# Altium PCB kbd_training.PcbDoc
Units mm, origin at the board's own origin, x right, y up, seen from the top; angles counter-clockwise.
Board outline 74 x 91.8 mm, 2 copper layers (Top Layer, Bottom Layer); 55 components, 41 nets, 240 pads, 29 vias.
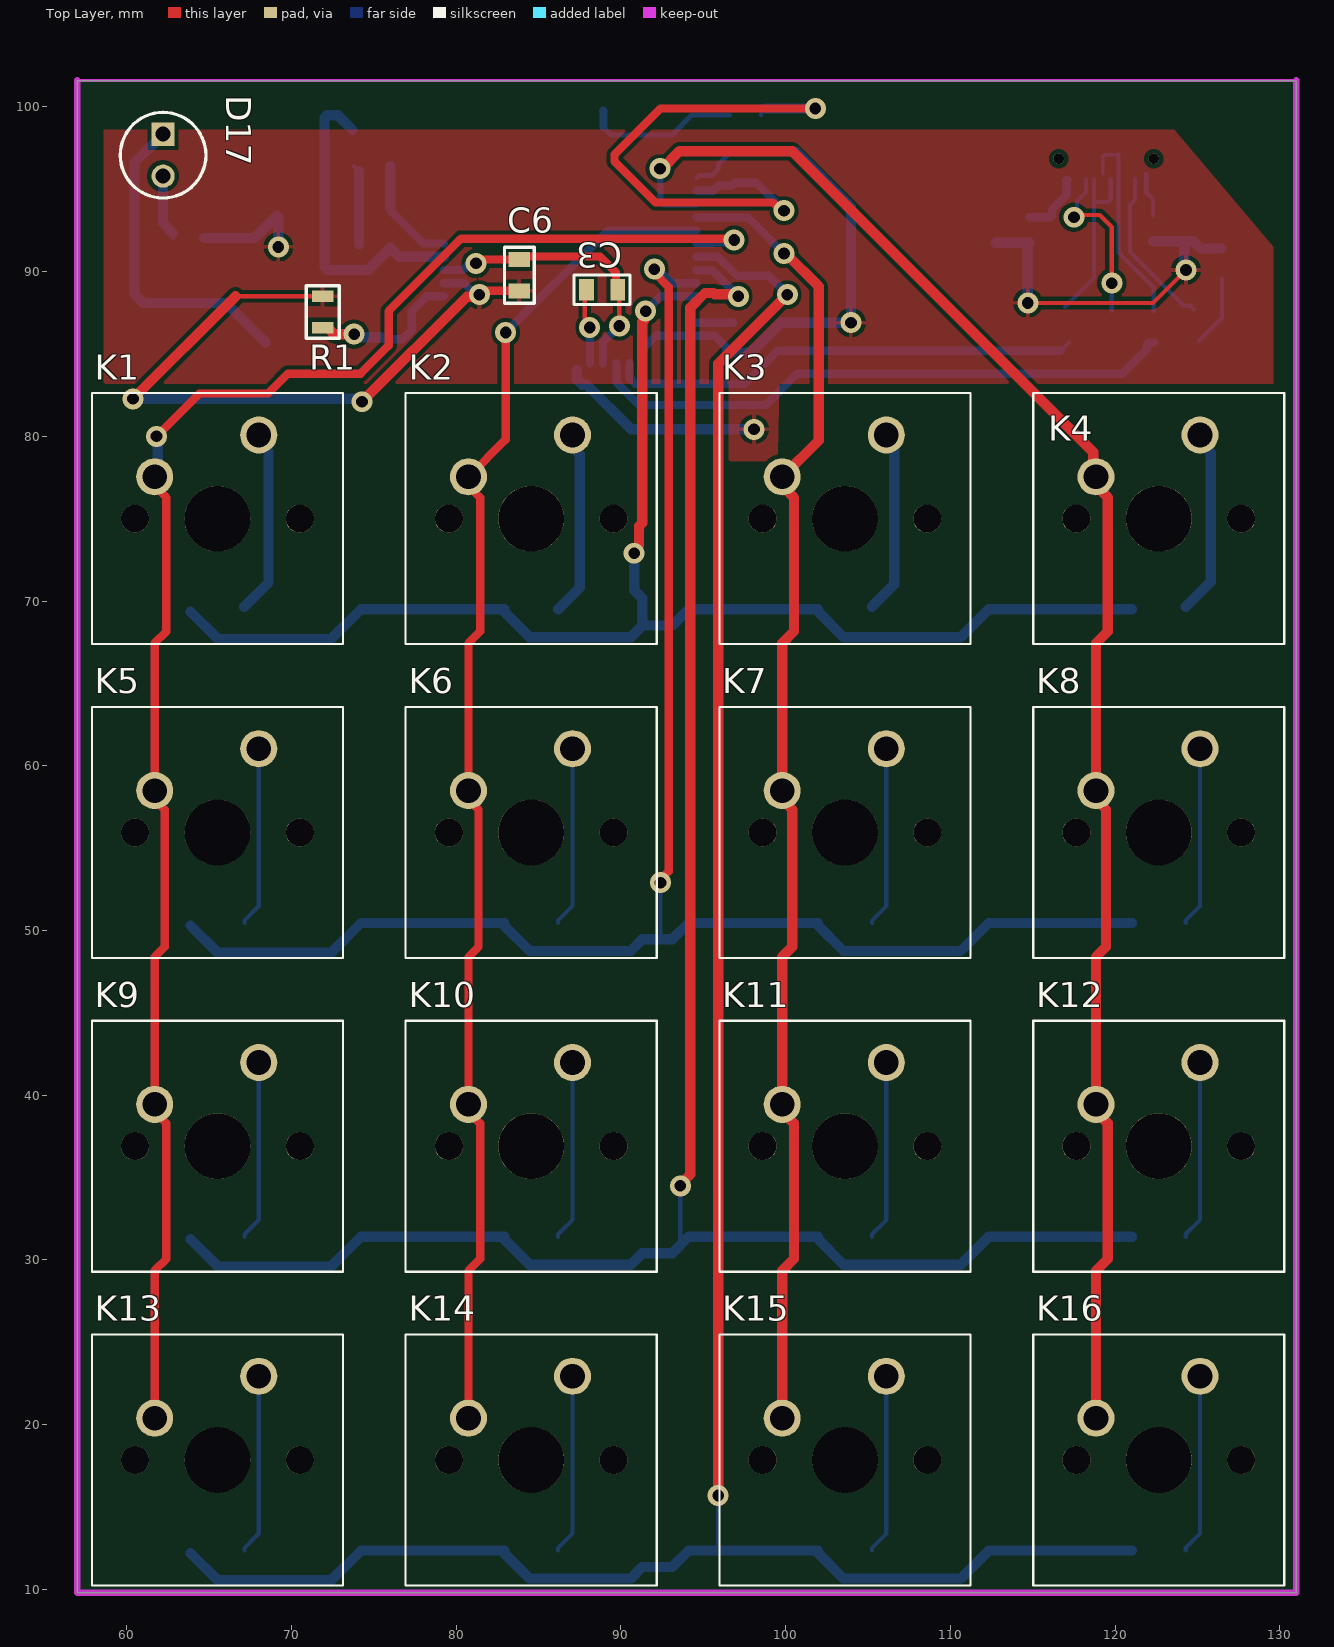
[diagram p0: Top Layer view]
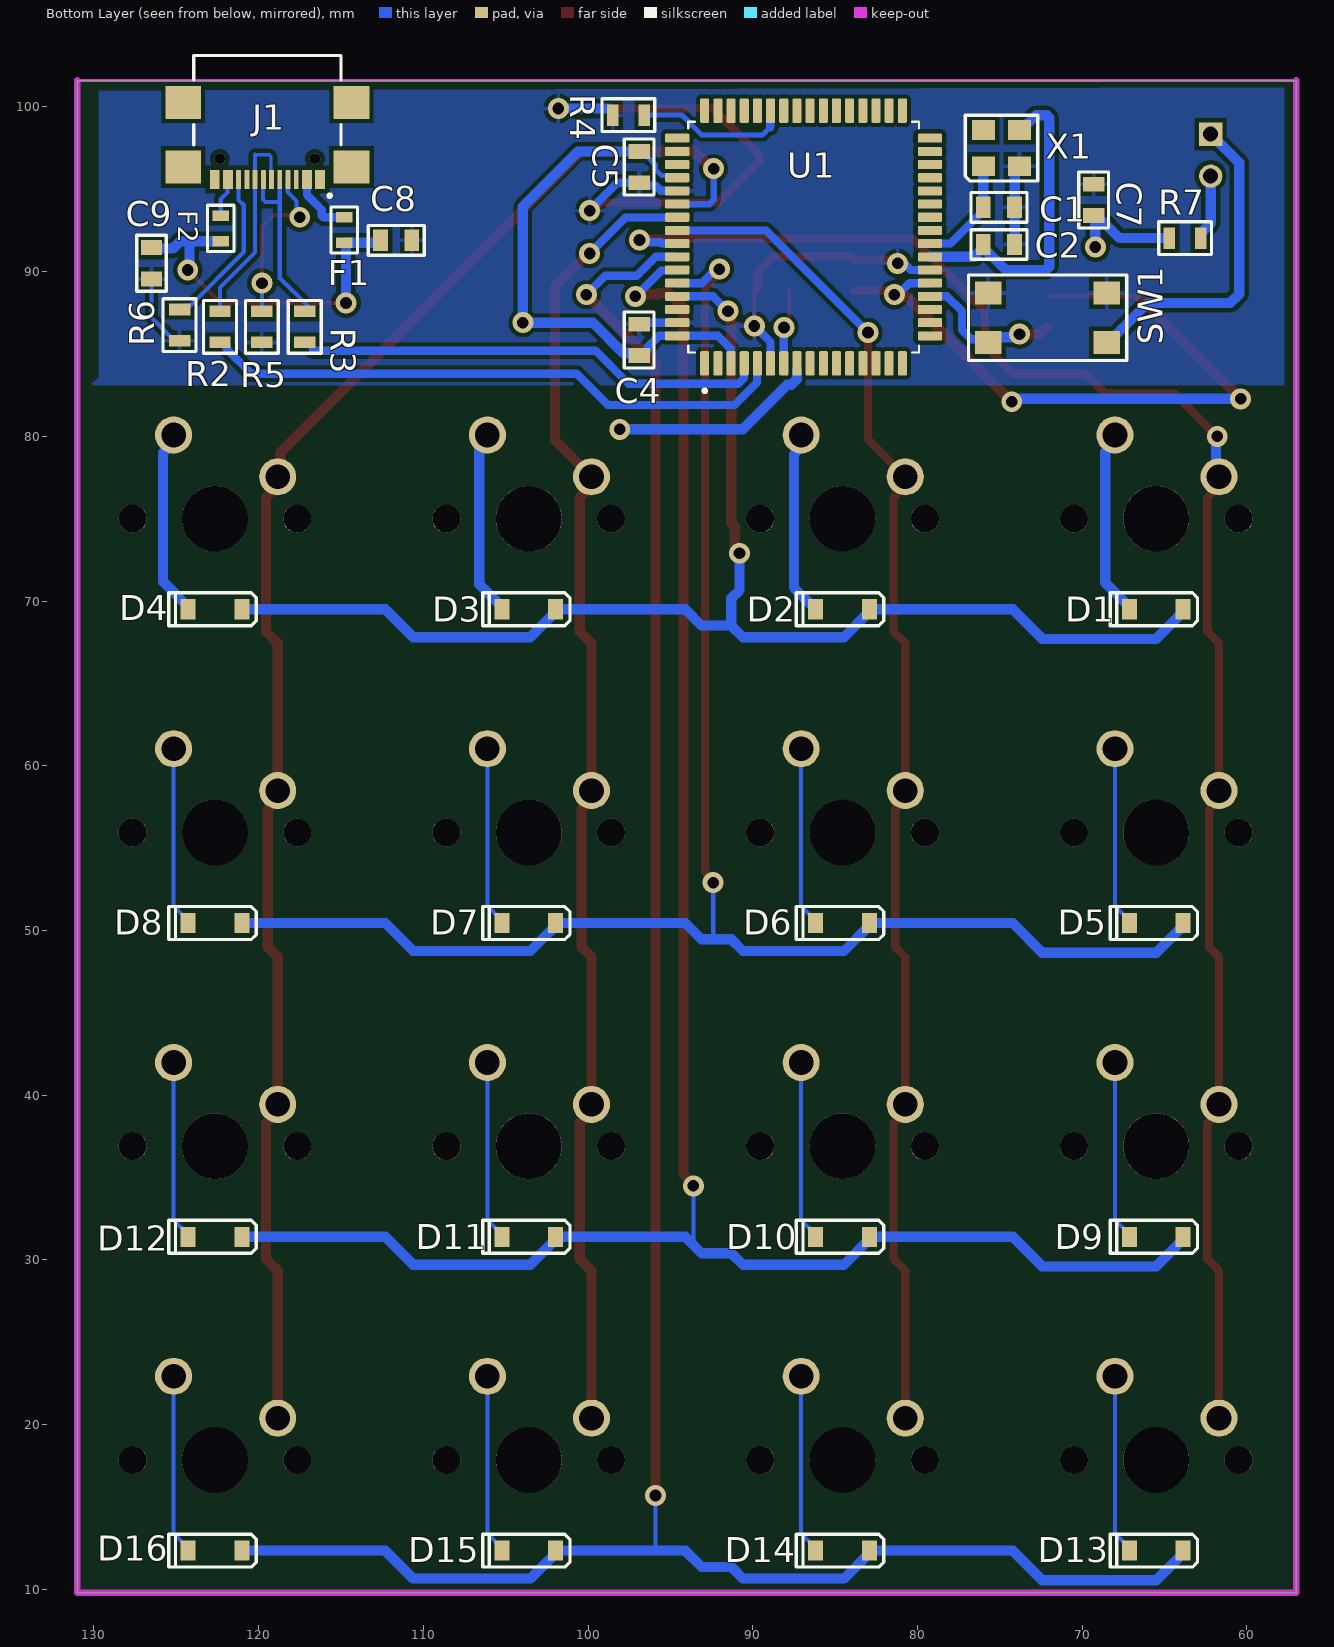
[diagram p1: Bottom Layer view, seen from below]

## Layer stack, top to bottom
Top Solder: solder mask 0.0102, Solder Resist, Dk 3.5
Top Layer: signal copper 0.0356
Dielectric 1: dielectric 0.32, FR-4, Dk 4.8
Bottom Layer: signal copper 0.0356
Bottom Solder: solder mask 0.0102, Solder Resist, Dk 3.5

## Board outline
57,9.8 131,9.8 131,101.6 57,101.6

## Design rules (kind name [scope] priority, off if disabled: settings)
Clearance [All] p1: gap=0.254 ignorepadtopadclearanceinfootprint=FALSE except(0: SMDPad-Hole THPad-Hole Via-Hole Fill-Hole Poly-Hole Region-Hole Text-Hole; 0.2: Arc-Arc Arc-Track Arc-SMDPad Track-Track Track-SMDPad SMDPad-SMDPad)
HoleSize [All] p1: absolutevalues=TRUE maxlimit=100 minlimit=0.025 maxpercent=80.000 minpercent=20.000
MinimumSolderMaskSliver [All] p1: minsoldermaskwidth=0
PolygonConnect [All] p1: connectstyle=Relief reliefconductorwidth=0.254 reliefentries=4 polygonreliefangle="90 Angle" airgapwidth=0.254
RoutingVias [All] p1: holewidth=0.711 width=1.27 viastyle="Through Hole" minholewidth=0.711 minwidth=1.27 maxholewidth=0.711 maxwidth=1.27
SilkToSilkClearance [All] p1: silktosilkclearance=0.15
SilkToSolderMaskClearance [IsPad] p1: minsilkscreentomaskgap=0.1 clearancetoexposedcopper=TRUE
SolderMaskExpansion [All] p1: expansion=0.065 istentingtop=FALSE
Width [All] p1: maxlimit=1 minlimit=0.127 preferedwidth=0.254 minimp=50.000000 maximp=50.000000 favimp=50.000000
26 further rules are at their usual default settings.

## Components (designator, comment, footprint, x,y, rotation, side; value= is the part's Value field where it differs from the comment)
C1 "22p" Cap0805 75.05,93.9 r180 bottom
C2 "22p" Cap0805 75.05,91.646 r180 bottom
C3 "1u" Cap0805 88.85,88.9 r180 top
C4 "0.1u" Cap0805 96.9,85.85 r270 bottom
C5 "0.1u" Cap0805 96.9,96.346 r90 bottom
C6 "0.1u" Cap0805 83.832,89.782 r270 top
C7 "0.1u" Cap0805 69.3,94.35 r270 bottom
C8 "0.1u" Cap0805 111.65,91.9 r0 bottom
C9 "4.7u" Cap0805 126.5,90.504 r90 bottom
D1 "1N4148W-TP" "1N4 diode" 65.5,69.5 r180 bottom
D2 "1N4148W-TP" "1N4 diode" 84.55,69.5 r180 bottom
D3 "1N4148W-TP" "1N4 diode" 103.6,69.5 r180 bottom
D4 "1N4148W-TP" "1N4 diode" 122.65,69.5 r180 bottom
D5 "1N4148W-TP" "1N4 diode" 65.5,50.45 r180 bottom
D6 "1N4148W-TP" "1N4 diode" 84.55,50.45 r180 bottom
D7 "1N4148W-TP" "1N4 diode" 103.6,50.45 r180 bottom
D8 "1N4148W-TP" "1N4 diode" 122.65,50.45 r180 bottom
D9 "1N4148W-TP" "1N4 diode" 65.5,31.4 r180 bottom
D10 "1N4148W-TP" "1N4 diode" 84.55,31.4 r180 bottom
D11 "1N4148W-TP" "1N4 diode" 103.6,31.4 r180 bottom
D12 "1N4148W-TP" "1N4 diode" 122.65,31.4 r180 bottom
D13 "1N4148W-TP" "1N4 diode" 65.5,12.35 r180 bottom
D14 "1N4148W-TP" "1N4 diode" 84.55,12.35 r180 bottom
D15 "1N4148W-TP" "1N4 diode" 103.6,12.35 r180 bottom
D16 "1N4148W-TP" "1N4 diode" 122.65,12.35 r180 bottom
D17 "WP5603SIDLK/SD/J3" MT5470EUR 62.2,98.34 r90 top
F1 "500mA" FUS0603 114.8,92.525 r270 bottom
F2 "500mA" FUS0603 122.3,92.625 r270 bottom
J1 "USB4110-GF-A" GCT_USB4110-GF-A_REVB 119.465,96.845 r0 bottom
K1 "MX1A-11NN" CHERRY_MX1A-11NN_SWITCH 65.5,75 r0 top
K2 "MX1A-11NN" CHERRY_MX1A-11NN_SWITCH 84.55,75 r0 top
K3 "MX1A-11NN" CHERRY_MX1A-11NN_SWITCH 103.6,75 r0 top
K4 "MX1A-11NN" CHERRY_MX1A-11NN_SWITCH 122.65,75 r0 top
K5 "MX1A-11NN" CHERRY_MX1A-11NN_SWITCH 65.5,55.95 r0 top
K6 "MX1A-11NN" CHERRY_MX1A-11NN_SWITCH 84.55,55.95 r0 top
K7 "MX1A-11NN" CHERRY_MX1A-11NN_SWITCH 103.6,55.95 r0 top
K8 "MX1A-11NN" CHERRY_MX1A-11NN_SWITCH 122.65,55.95 r0 top
K9 "MX1A-11NN" CHERRY_MX1A-11NN_SWITCH 65.5,36.9 r0 top
K10 "MX1A-11NN" CHERRY_MX1A-11NN_SWITCH 84.55,36.9 r0 top
K11 "MX1A-11NN" CHERRY_MX1A-11NN_SWITCH 103.6,36.9 r0 top
K12 "MX1A-11NN" CHERRY_MX1A-11NN_SWITCH 122.65,36.9 r0 top
K13 "MX1A-11NN" CHERRY_MX1A-11NN_SWITCH 65.5,17.85 r0 top
K14 "MX1A-11NN" CHERRY_MX1A-11NN_SWITCH 84.55,17.85 r0 top
K15 "MX1A-11NN" CHERRY_MX1A-11NN_SWITCH 103.6,17.85 r0 top
K16 "MX1A-11NN" CHERRY_MX1A-11NN_SWITCH 122.65,17.85 r0 top
R1 "10k" Res0805 71.9,87.55 r270 top
R2 "22R" Res0805 122.346,86.65 r270 bottom
R3 "22R" Res0805 117.2,86.65 r270 bottom
R4 "10k" Res0805 97.55,99.5 r180 bottom
R5 "5.1k" Res0805 119.8,86.65 r270 bottom
R6 "5.1k" Res0805 124.8,86.75 r270 bottom
R7 "10k" Res0805 63.75,92.034 r0 bottom
SW1 "TL3305AF160QG" "TL3305 SW" 72.1,87.2 r180 bottom
U1 "AT90USB1286-AU" QFP80P1600X1600X120-64N 86.916,92.1 r90 bottom
X1 "16MHz" xtal-m403 74.9,97.5 r180 bottom

## Footprints (in the part's own frame and the unit in brackets; to place one, negate y for a bottom-side part, rotate by r counter-clockwise, add the part's x,y. Pads: shape width x height; smd on the part's side, far side on the other; paste and mask are expansions set on the pad)
"1N4 diode" [mm]
  rect 0.91x1.22 smd: 1(-1.635,0) 2(1.635,0)
  silkscreen extent -2.8,-1 2.5,1
Cap0805 [mm]
  rect 0.9x1.3 smd: 1(-0.95,0) 2(0.95,0)
  silkscreen extent -1.7,-0.9 1.7,0.9
CHERRY_MX1A-11NN_SWITCH [mm]
  round 2.25 hole 1.5: 1(2.51,5.08) 2(-3.81,2.54)
  round 1.7 hole 1.7 unplated: ""(-5,0) ""(5,0)
  round 3.988 hole 3.988 unplated: ""(0,0)
  silkscreen extent -7.62,-7.62 7.62,7.62
FUS0603 [mm]
  rect 0.65x1 smd: 1(-0.775,0) 2(0.775,0)
  silkscreen extent -1.4,-0.8 1.4,0.8
GCT_USB4110-GF-A_REVB [mm]
  rect 0.6x1.15 smd paste+0: A1/B12(-3.2,1.25)
  rect 0.6x1.15 smd: A4/B9(-2.4,1.25) B1/A12(3.2,1.25) B4/A9(2.4,1.25)
  rect 0.3x1.15 smd: A5(-1.25,1.25) A6(-0.25,1.25) A7(0.25,1.25) A8(1.25,1.25) B5(1.75,1.25) B6(0.75,1.25) B7(-0.75,1.25) B8(-1.75,1.25)
  rect 2.18x2 smd: S1(-5.11,0.5) S2(5.11,0.5) S3(-5.11,-3.43) S4(5.11,-3.43)
  round 0.65 hole 0.65 unplated mask+0.06: ""(-2.89,0) ""(2.89,0)
  silkscreen extent -4.47,-6.28 4.47,2.33, body extent -5.65,-6.24 5.65,1.44, height 3.23
MT5470EUR [mm]
  rect 1.416x1.416 hole 0.91: 1(0,0)
  round 1.416 hole 0.91: 2(-2.54,0)
  silkscreen extent -3.87,-2.6 1.33,2.6, body extent -3.87,-2.6 1.33,2.6, height 8.65
QFP80P1600X1600X120-64N [mm]
  rrect25% 1.47x0.55 smd: 1(-7.67,6) 2(-7.67,5.2) 3(-7.67,4.4) 4(-7.67,3.6) 5(-7.67,2.8) 6(-7.67,2) 7(-7.67,1.2) 8(-7.67,0.4) 9(-7.67,-0.4) 10(-7.67,-1.2) 11(-7.67,-2) 12(-7.67,-2.8) 13(-7.67,-3.6) 14(-7.67,-4.4) 15(-7.67,-5.2) 16(-7.67,-6) 33(7.67,-6) 34(7.67,-5.2) 35(7.67,-4.4) 36(7.67,-3.6) 37(7.67,-2.8) 38(7.67,-2) 39(7.67,-1.2) 40(7.67,-0.4) 41(7.67,0.4) 42(7.67,1.2) 43(7.67,2) 44(7.67,2.8) 45(7.67,3.6) 46(7.67,4.4) 47(7.67,5.2) 48(7.67,6)
  rrect25% 0.55x1.47 smd: 17(-6,-7.67) 18(-5.2,-7.67) 19(-4.4,-7.67) 20(-3.6,-7.67) 21(-2.8,-7.67) 22(-2,-7.67) 23(-1.2,-7.67) 24(-0.4,-7.67) 25(0.4,-7.67) 26(1.2,-7.67) 27(2,-7.67) 28(2.8,-7.67) 29(3.6,-7.67) 30(4.4,-7.67) 31(5.2,-7.67) 32(6,-7.67) 49(6,7.67) 50(5.2,7.67) 51(4.4,7.67) 52(3.6,7.67) 53(2.8,7.67) 54(2,7.67) 55(1.2,7.67) 56(0.4,7.67) 57(-0.4,7.67) 58(-1.2,7.67) 59(-2,7.67) 60(-2.8,7.67) 61(-3.6,7.67) 62(-4.4,7.67) 63(-5.2,7.67) 64(-6,7.67)
  silkscreen extent -9.44,-7 7,7
Res0805 [mm]
  rect 0.7x1.3 smd: 1(-0.95,0) 2(0.95,0)
  silkscreen extent -1.6,-1 1.6,1
"TL3305 SW" [mm]
  rect 1.6x1.4 smd: 1(-3.6,-1.5) 2(3.6,-1.5) 3(-3.6,1.5) 4(3.6,1.5)
  silkscreen extent -4.8,-2.6 4.8,2.6
xtal-m403 [mm]
  rect 1.4x1.2 smd: 1(-1.1,-1.1) 2(1.1,-1.1) 3(1.1,1.1) 4(-1.1,1.1)
  silkscreen extent -2.2,-2 2.2,2

## Part data
C1 C2: library part C0805C220J5GACTU, "Cap Ceramic 22pF 50V C0G 5% SMD 0805 125C Plastic T/R", Capacitance=22pF, Case Code (Imperial)=0805, Case Code (Metric)=2012, Dielectric=C0G, Dielectric Material=Ceramic, Manufacturer=KEMET, Max Operating Temperature=125°C, Min Operating Temperature=-55°C, Package Quantity=1, Supplier Part Number 1=399-C0805C220J5GAC7800CT-ND, Temperature Coefficient=30ppm/°C, Tolerance=5%, Voltage=50V, Case/Package=0805, Category="Ceramic Capacitors", ComponentLink1Description=https://datasheet.ciiva.com/7842/1732694-7842250.pdf?src-supplier=Element14, ComponentLink1URL=https://datasheet.ciiva.com/7842/1732694-7842250.pdf?src-supplier=Element14, ComponentLink2Description=https://datasheet.ciiva.com/7842/1372242-7842570.pdf?src-supplier=Element14, ComponentLink2URL=https://datasheet.ciiva.com/7842/1372242-7842570.pdf?src-supplier=Element14, ComponentLink3Description=https://datasheet.ciiva.com/7842/1732694-7842251.pdf?src-supplier=Element14, ComponentLink3URL=https://datasheet.ciiva.com/7842/1732694-7842251.pdf?src-supplier=Element14, ComponentLink4Description=https://datasheet.ciiva.com/7842/kem-c1003-c0g-smd-7842569.pdf?src-supplier=Element14, ComponentLink4URL=https://datasheet.ciiva.com/7842/kem-c1003-c0g-smd-7842569.pdf?src-supplier=Element14, ComponentLink5Description=https://datasheet.ciiva.com/28668/1789732-28668761.pdf?src-supplier=Element14, ComponentLink5URL=https://datasheet.ciiva.com/28668/1789732-28668761.pdf?src-supplier=Element14, Construction=Flat, Contact Material=Tin, Contact Plating=Tin,Matte, Depth=1.25mm, Height=0.78mm, Lead Free="Lead Free", Length=2mm, Manufacturer Part Number=C0805C220J5GACTU, Mount="PCB,Surface Mount", Packaging="Tape and Reel", Pricing 1="1=0.10000, 10=0.06000, 50=0.03300, 100=0.02700, 500=0.01924, 1000=0.01512 (USD)", Radiation Hardening=No, REACH SVHC="No SVHC", RoHS=Yes, Series=C0805C, Stock 1=630269, Supplier 1=Digi-Key, Termination=SMD/SMT, Thickness=0.035inch, Voltage Rating=50V, Voltage Rating (DC)=50V, Weight=0.000194oz, Width=1.25mm
C3: library part 885012207051, "Cap, 1ΜF, 16V, 10%, X7R, 0805", Capacitance=1uF, Case Code (Imperial)=0805, Case Code (Metric)=2012, Manufacturer="Wurth Electronics", Max Operating Temperature=125°C, Min Operating Temperature=-55°C, Supplier Part Number 1=732-7664-1-ND, Tolerance=10%, Voltage Rating=16V, Case/Package=0805, Category="Ceramic Capacitors", ComponentLink1Description=http://www.farnell.com/datasheets/2031863.pdf?src-supplier=Farnell, ComponentLink1URL=http://www.farnell.com/datasheets/2031863.pdf?src-supplier=Farnell, ComponentLink2Description=http://www.farnell.com/datasheets/2031863.pdf?src-supplier=Newark, ComponentLink2URL=http://www.farnell.com/datasheets/2031863.pdf?src-supplier=Newark, ComponentLink3Description=http://www.farnell.com/datasheets/2031863.pdf?src-supplier=Element14, ComponentLink3URL=http://www.farnell.com/datasheets/2031863.pdf?src-supplier=Element14, ComponentLink4Description=https://katalog.we-online.de/pbs/datasheet/885012207051.pdf?src-supplier=Digi-Key, ComponentLink4URL=https://katalog.we-online.de/pbs/datasheet/885012207051.pdf?src-supplier=Digi-Key, Length=0.079inch, Manufacturer Part Number=885012207051, Mount="Surface Mount", Packaging="Tape and Reel", Pricing 1="1=0.10000, 10=0.08200, 100=0.07400, 500=0.06500 (USD)", RoHS=Yes, RoHS Compliant=Yes, Stock 1=58540, Supplier 1=Digi-Key, Thickness=0.053inch, Width=0.049inch
C4 C5 C6 C7 C8: library part CC0805ZRY5V9BB104, "Cap Ceramic 0.1uF 50V Y5V -20% to 80% SMD 0805 85C T/R", Capacitance=100nF, Case Code (Imperial)=0805, Case Code (Metric)=2012, Dielectric=Y5V, Dielectric Material=Ceramic, Manufacturer=Yageo, Max Operating Temperature=85°C, Min Operating Temperature=-30°C, Package Quantity=1, Supplier Part Number 1=311-1361-1-ND, Tolerance=80%, Voltage Rating=50V, Case/Package=0805, Category="Ceramic Capacitors", ComponentLink1Description=https://datasheet.ciiva.com/28450/1132289-28450870.pdf?src-supplier=Element14, ComponentLink1URL=https://datasheet.ciiva.com/28450/1132289-28450870.pdf?src-supplier=Element14, ComponentLink2Description=https://datasheet.ciiva.com/144/mlccorderingcode-144210.pdf?src-supplier=Digi-Key, ComponentLink2URL=https://datasheet.ciiva.com/144/mlccorderingcode-144210.pdf?src-supplier=Digi-Key, ComponentLink3Description=https://datasheet.ciiva.com/144/mlccorderingcode-144209.pdf?src-supplier=Digi-Key, ComponentLink3URL=https://datasheet.ciiva.com/144/mlccorderingcode-144209.pdf?src-supplier=Digi-Key, ComponentLink4Description=https://datasheet.ciiva.com/144/mlccorderingcode-144211.pdf?src-supplier=Digi-Key, ComponentLink4URL=https://datasheet.ciiva.com/144/mlccorderingcode-144211.pdf?src-supplier=Digi-Key, ComponentLink5Description=https://datasheet.ciiva.com/13389/upy-gp-np0-16v-to-50v-8-13389351.pdf?src-supplier=Mouser, ComponentLink5URL=https://datasheet.ciiva.com/13389/upy-gp-np0-16v-to-50v-8-13389351.pdf?src-supplier=Mouser, ComponentLink6Description=https://datasheet.ciiva.com/11465/upy-gphc-y5v-6-3v-to-50v-5-11465865.pdf?src-supplier=Avnet, ComponentLink6URL=https://datasheet.ciiva.com/11465/upy-gphc-y5v-6-3v-to-50v-5-11465865.pdf?src-supplier=Avnet, ComponentLink7Description=https://datasheet.ciiva.com/16747/upy-gphc-y5v-6-3v-to-50v-5-revised-16747323.pdf?src-supplier=Future+Electronics, ComponentLink7URL=https://datasheet.ciiva.com/16747/upy-gphc-y5v-6-3v-to-50v-5-revised-16747323.pdf?src-supplier=Future+Electronics, ComponentLink8Description=https://datasheet.ciiva.com/15189/getdatasheetpartid-55882-15189238.pdf?src-supplier=Verical, ComponentLink8URL=https://datasheet.ciiva.com/15189/getdatasheetpartid-55882-15189238.pdf?src-supplier=Verical, ComponentLink9Description=https://datasheet.ciiva.com/29241/445331-da-01-en-kerko-chip-0805-y5v0-1uf-20-80proz50vg-29241946.pdf?src-supplier=Conrad, ComponentLink9URL=https://datasheet.ciiva.com/29241/445331-da-01-en-kerko-chip-0805-y5v0-1uf-20-80proz50vg-29241946.pdf?src-supplier=Conrad, Construction=Flat, Depth=1.25mm, Halogen Free="Halogen Free", Height=0.6mm, Lead Free="Lead Free", Length=2mm, Manufacturer Part Number=CC0805ZRY5V9BB104, Material=Ceramic, Mount="Surface Mount", Number of Pins=2, Packaging="Tape and Reel", Pricing 1="1=0.10000, 10=0.06700, 50=0.03640, 100=0.02960, 500=0.02118, 1000=0.01664 (USD)", Radiation Hardening=No, REACH SVHC="No SVHC", Resistor Type=Ceramic, RoHS=Yes, RoHS Compliant=Yes, Series=CC, Stock 1=957069, Supplier 1=Digi-Key, Termination=SMD/SMT, Thickness=0.024inch, Voltage Rating (DC)=50V, Width=0.049inch
C9: library part CL21A475KPFNNNE, "Cap Ceramic 4.7uF 10V X5R 10% SMD 0805 85C T/R", Capacitance=4.7uF, Case Code (Imperial)=0805, Case Code (Metric)=2012, Dielectric=X5R, Manufacturer=Samsung, Max Operating Temperature=85°C, Min Operating Temperature=-55°C, Package Quantity=1, Supplier Part Number 1=1276-1259-1-ND, Tolerance=10%, Voltage Rating=10V, Case/Package=0805, Category="Ceramic Capacitors", ComponentLink1Description=https://datasheet.ciiva.com/25766/cl21a475kpfnnne-25766898.pdf?src-supplier=Digi-Key, ComponentLink1URL=https://datasheet.ciiva.com/25766/cl21a475kpfnnne-25766898.pdf?src-supplier=Digi-Key, ComponentLink2Description=https://datasheet.ciiva.com/15216/getdatasheetpartid-358357-15216235.pdf?src-supplier=Verical, ComponentLink2URL=https://datasheet.ciiva.com/15216/getdatasheetpartid-358357-15216235.pdf?src-supplier=Verical, ComponentLink3Description=https://datasheet.ciiva.com/26310/mlcc-catalogdownload2013-eng-26310173.pdf?src-supplier=Distrelec, ComponentLink3URL=https://datasheet.ciiva.com/26310/mlcc-catalogdownload2013-eng-26310173.pdf?src-supplier=Distrelec, ComponentLink4Description=https://datasheet.ciiva.com/16374/cl05b104kq5nnnc-16374138.pdf?src-supplier=Future+Electronics, ComponentLink4URL=https://datasheet.ciiva.com/16374/cl05b104kq5nnnc-16374138.pdf?src-supplier=Future+Electronics, Construction=Flat, Contact Plating=Tin, Depth=1.25mm, Height=1.25mm, Lead Free="Lead Free", Length=2mm, Manufacturer Part Number=CL21A475KPFNNNE, Mount="Surface Mount", Packaging="Tape and Reel", Pricing 1="1=0.10000, 10=0.07500, 50=0.04060, 100=0.03320, 500=0.02372, 1000=0.01863 (USD)", Radiation Hardening=No, RoHS=Yes, RoHS Compliant=Yes, Series=CL, Stock 1=1032476, Supplier 1=Digi-Key, Thickness=0.053inch, Voltage Rating (DC)=10V, Width=0.049inch
D1 D2 D3 D4 D5 D6 D7 D8 D9 D10 D11 D12 D13 D14 D15 D16: "VR=100V IF=300mA Trr=4ns P=400mW", Average Rectified Current=150mA, Capacitance=4pF, Forward Voltage=1V, Manufacturer=MCC, Max Forward Surge Current (Ifsm)=1A, Max Operating Temperature=150°C, Max Repetitive Reverse Voltage (Vrrm)=100V, Max Reverse Leakage Current=5uA, Max Surge Current=2A, Min Operating Temperature=-65°C, Package Quantity=3000, Power Dissipation=400mW, Supplier Part Number 1=1N4148WTPMSCT-ND, Category="Rectifier Diodes", ComponentLink1Description=https://datasheet.ciiva.com/16836/1n4148wsod123-16836277.pdf?src-supplier=Future+Electronics, ComponentLink1URL=https://datasheet.ciiva.com/16836/1n4148wsod123-16836277.pdf?src-supplier=Future+Electronics, ComponentLink2Description=https://datasheet.ciiva.com/1243/1684829-1243908.pdf?src-supplier=Newark, ComponentLink2URL=https://datasheet.ciiva.com/1243/1684829-1243908.pdf?src-supplier=Newark, ComponentLink3Description=https://datasheet.ciiva.com/4435/1n4148wsod123-48460-4435223.pdf?src-supplier=Mouser, ComponentLink3URL=https://datasheet.ciiva.com/4435/1n4148wsod123-48460-4435223.pdf?src-supplier=Mouser, ComponentLink4Description=https://datasheet.ciiva.com/7622/1684829-7622556.pdf?src-supplier=Element14, ComponentLink4URL=https://datasheet.ciiva.com/7622/1684829-7622556.pdf?src-supplier=Element14, ComponentLink5Description=https://datasheet.ciiva.com/911/1n4148wsod123-911677.pdf?src-supplier=Digi-Key, ComponentLink5URL=https://datasheet.ciiva.com/911/1n4148wsod123-911677.pdf?src-supplier=Digi-Key, ComponentLink6Description=https://datasheet.ciiva.com/911/1n4148wsod123-911678.pdf?src-supplier=Digi-Key, ComponentLink6URL=https://datasheet.ciiva.com/911/1n4148wsod123-911678.pdf?src-supplier=Digi-Key, ComponentLink7Description=https://datasheet.ciiva.com/911/1n4148wsod123-911676.pdf?src-supplier=Digi-Key, ComponentLink7URL=https://datasheet.ciiva.com/911/1n4148wsod123-911676.pdf?src-supplier=Digi-Key, ComponentLink8Description=https://datasheet.ciiva.com/22747/1684829-22747439.pdf?src-supplier=Element14, ComponentLink8URL=https://datasheet.ciiva.com/22747/1684829-22747439.pdf?src-supplier=Element14, ComponentLink9Description=https://datasheet.ciiva.com/14557/70055519-14557767.pdf?src-supplier=Allied+Electronics, ComponentLink9URL=https://datasheet.ciiva.com/14557/70055519-14557767.pdf?src-supplier=Allied+Electronics, Current Rating=150mA, Element Configuration=Single, Forward Current=150mA, Height=1.2mm, Lead Free="Lead Free", Length=2.85mm, Manufacturer Part Number=1N4148W-TP, Max Reverse Voltage (DC)=100V, Mount="Surface Mount", Number of Pins=2, Output Current=150mA, Packaging="Tape and Reel", Peak Non-Repetitive Surge Current=2A, Polarity=Standard, Pricing 1="1=0.19000, 10=0.17300, 100=0.09440, 500=0.05808, 1000=0.03960 (USD)", Radiation Hardening=No, REACH SVHC=Unknown, Recovery Time=4ns, Reverse Recovery Time=4ns, Reverse Recovery Time-Max=4ns, RoHS=Yes, RoHS Compliant=Yes, Series=1N4148, Stock 1=5873694, Supplier 1=Digi-Key, Voltage Rating (DC)=100V, Width=1.8mm
D17: "LED Uni-Color Hyper Red 640nm 2-Pin Bulk", Case/Package=Radial, Color=Red, Forward Voltage=2.2V, Manufacturer=Kingbright, Supplier Part Number 1=754-2132-ND, Test Current=20mA, Category=LEDs, ComponentLink1Description=http://www.kingbrightusa.com/images/catalog/SPEC/WP5603SIDLK-SD-J3.pdf?src-supplier=Digi-Key, ComponentLink1URL=http://www.kingbrightusa.com/images/catalog/SPEC/WP5603SIDLK-SD-J3.pdf?src-supplier=Digi-Key, Dominant Wavelength=625nm, Height=7.25mm, Lens Color=Red, Lens Size=3.8mm, Lens Style=Elliptical,Domed, Lens Transparency=Diffused, Luminous Intensity=2400mcd, Manufacturer Part Number=WP5603SIDLK/SD/J3, Mount="Through Hole", Packaging=Bulk, Pricing 1="1=0.68000, 10=0.42000, 100=0.24140, 1000=0.18889, 2000=0.17315, 5000=0.15741, 10000=0.14850 (USD)", RoHS=Yes, RoHS Compliant=Yes, Stock 1=11905, Supplier 1=Digi-Key, Viewing Angle=40°
F1 F2: library part ERBRD0R50X, "Fuse Chip Fast Acting 0.5A 32V SMD Solder Pad 0402 1 X 0.5 X 0.39mm T/R UL/cUL", Case Code (Imperial)=0402, Case Code (Metric)=1005, DC Cold Resistance=310mR, Manufacturer=Panasonic, Max Operating Temperature=125°C, Max Voltage Rating (DC)=32V, Min Operating Temperature=-40°C, Package Quantity=10000, Supplier Part Number 1=P15122CT-ND, Approvals=UL, Body Material=Alumina, Case/Package=0402, Category=Fuses, ComponentLink1Description=https://datasheet.ciiva.com/25619/0900766b810c2f76-25619805.pdf?src-supplier=RSComponents, ComponentLink1URL=https://datasheet.ciiva.com/25619/0900766b810c2f76-25619805.pdf?src-supplier=RSComponents, ComponentLink2Description=https://datasheet.ciiva.com/46392/1328695-46392479.pdf?src-supplier=Element14, ComponentLink2URL=https://datasheet.ciiva.com/46392/1328695-46392479.pdf?src-supplier=Element14, ComponentLink3Description=https://datasheet.ciiva.com/5813/1328695-5813610.pdf?src-supplier=Farnell, ComponentLink3URL=https://datasheet.ciiva.com/5813/1328695-5813610.pdf?src-supplier=Farnell, ComponentLink4Description=https://datasheet.ciiva.com/24088/panasonic-afa0000ce6-327311-24088239.pdf?src-supplier=Mouser, ComponentLink4URL=https://datasheet.ciiva.com/24088/panasonic-afa0000ce6-327311-24088239.pdf?src-supplier=Mouser, ComponentLink5Description=https://datasheet.ciiva.com/299/afa0000ce6-299063.pdf?src-supplier=Digi-Key, ComponentLink5URL=https://datasheet.ciiva.com/299/afa0000ce6-299063.pdf?src-supplier=Digi-Key, ComponentLink6Description=https://datasheet.ciiva.com/299/afa0000ce6-299064.pdf?src-supplier=Digi-Key, ComponentLink6URL=https://datasheet.ciiva.com/299/afa0000ce6-299064.pdf?src-supplier=Digi-Key, ComponentLink7Description=https://datasheet.ciiva.com/299/afa0000ce6-299062.pdf?src-supplier=Digi-Key, ComponentLink7URL=https://datasheet.ciiva.com/299/afa0000ce6-299062.pdf?src-supplier=Digi-Key, Current=500mA, Current Rating=500mA, Fuse Current=500mA, Fuse Size="1 X 0.5mm", Fuse Type="Board Mount (Cartridge Style Excluded)", Height=0.39mm, Length=1mm, Manufacturer Part Number=ERBRD0R50X, Mount="Surface Mount", Number of Pins=2, Packaging="Tape and Reel", Pricing 1="1=0.27000, 5=0.26400, 10=0.25300, 50=0.22540, 100=0.20980, 250=0.18648, 500=0.15540, 1000=0.14763, 5000=0.11655 (USD)", REACH SVHC="No SVHC", RoHS=Yes, RoHS Compliant=Yes, Series=ERB-RD, Stock 1=6080, Supplier 1=Digi-Key, Voltage Rating=32V, Voltage Rating (DC)=32V, Width=0.5mm
J1: library part CMP-245163-000002-1, "CONN USB 2.0 TYPE-C R/A SMT", Current Rating=3/4.25/1.25/0.25A, Manufacturer=GCT, Package=0, Temperature="-40°C to +85°C", Temperature Range High=+85°C, Temperature Range Low=-40°C, Voltage Rating=20V, Automotive=No, Category=Conn, ComponentLink2Description=Datasheet, ComponentLink2URL=https://gct.co/files/drawings/usb4110.pdf, Conn Orientation="Right Angle", Contact Material=Gold,Nickel, Device Class L1=Connectors, Device Class L2="USB Connectors", Device Class L3=unset, Digikey Description="CONN USB 2.0 TYPE-C R/A SMT", Height=3.46mm, Is Female=yes, Lead Free=Yes, Manufacturer Part Number=USB4110-GF-A, Number Of Contacts=16, Octopart=https://octopart.com/usb4110-gf-a-gct-103941985, RoHS=TRUE, Shielding=true, Standoff Height=0.1mm, Usb Standard="USB 2.0"
K1 K2 K3 K4 K5 K6 K7 K8 K9 K10 K11 K12 K13 K14 K15 K16: "Switch Key N.O. SPST 0.01A 12VAC 12VDC 0.58N PC Pins 50000000Cycles Thru-Hole", Case/Package=Module, Contact Current Rating=10mA, Contact Resistance=200mR, Flammability Rating="UL94 HB", Insulation Resistance=100MR, Manufacturer=Cherry, Max Operating Temperature=70°C, Max Voltage Rating (AC)=12V, Min Operating Temperature=-10°C, Operating Force=60N, Package Quantity=1000, Ratings=IP40, Supplier Part Number 1=CH162-ND, Actuator Length=3.6mm, Actuator Type=PLUNGER, Category="Pushbutton Switches", ComponentLink1Description=https://datasheet.ciiva.com/7637/1792245-7637139.pdf?src-supplier=Element14, ComponentLink1URL=https://datasheet.ciiva.com/7637/1792245-7637139.pdf?src-supplier=Element14, ComponentLink2Description=https://datasheet.ciiva.com/29188/706315-da-01-de-tastenmodul-mx1a-11nn-0-01a-12v-29188125.pdf?src-supplier=Conrad, ComponentLink2URL=https://datasheet.ciiva.com/29188/706315-da-01-de-tastenmodul-mx1a-11nn-0-01a-12v-29188125.pdf?src-supplier=Conrad, ComponentLink3Description=https://datasheet.ciiva.com/2869/mxseries-2869565.pdf?src-supplier=Digi-Key, ComponentLink3URL=https://datasheet.ciiva.com/2869/mxseries-2869565.pdf?src-supplier=Digi-Key, ComponentLink4Description=https://datasheet.ciiva.com/14542/70207618-14542184.pdf?src-supplier=Allied+Electronics, ComponentLink4URL=https://datasheet.ciiva.com/14542/70207618-14542184.pdf?src-supplier=Allied+Electronics, Contact Material=Gold,Silver, Contact Plating=Gold, Contact Type="1 maker", Current Rating=10mA, Electrical Life=50000000Cycles, Housing Material=Thermoplastic, Illumination Type=Illuminated, Lead Free="Lead Free", Length=15.6mm, Life (Cycles)=50000000Cycles, Life (Hours)=50000000Hour, Manufacturer Part Number=MX1A-11NN, Max Current Rating=10mA, Max Voltage Rating (DC)=12V, Mount="Panel,Front,Through Hole,PCB", Number of Pins=2, Number of Terminals/Pins=2, Orientation=Straight, Packaging=Bulk, Pricing 1="1=0.99000, 10=0.88600, 25=0.84080, 50=0.79980, 100=0.76230, 250=0.72872, 500=0.65398, 1000=0.61660 (USD)", REACH SVHC="No SVHC", RoHS=Yes, RoHS Compliant=Yes, Row Spacing=6.35mm, Series=MX, Stock 1=12102, Supplier 1=Digi-Key, Switch Function=Off-Mom, Switching Current=10mA, Terminal Pitch=2.54mm, Termination="PC Pin", Throw Configuration=SPST, Voltage Rating (AC)=12V, Voltage Rating (DC)=12V, Width=15.6mm
R1 R4 R7: library part RMCF0805JT10K0, "Res Thick Film 0805 10K Ohm 5% 0.125W(1/8W) ±200ppm/C Pad SMD Automotive T/R", Case Code (Imperial)=0805, Case Code (Metric)=2012, Manufacturer="Stackpole Electronics", Max Operating Temperature=155°C, Max Power Dissipation=125mW, Min Operating Temperature=-55°C, Resistance=10kR, Resistor Type="Thick Film", Supplier Part Number 1=RMCF0805JT10K0CT-ND, Temperature Coefficient=100ppm/°C, Tolerance=5%, Case/Package=0805, Category="Chip SMD Resistors", ComponentLink1Description=https://datasheet.ciiva.com/15193/getdatasheetpartid-363745-15193627.pdf?src-supplier=Verical, ComponentLink1URL=https://datasheet.ciiva.com/15193/getdatasheetpartid-363745-15193627.pdf?src-supplier=Verical, Construction=Rectangular, Contact Plating=Tin,Matte, Depth=1.25mm, Features="Automotive AEC-Q200", Height=0.026inch, Lead Free="Lead Free", Length=2mm, Manufacturer Part Number=RMCF0805JT10K0, Military Standard=Not, Mount="Surface Mount", Number of Terminations=2, Packaging="Tape and Reel", Power Rating=125mW, Pricing 1="1=0.10000, 10=0.02000, 100=0.00810, 1000=0.00366, 2500=0.00318 (USD)", Radiation Hardening=No, RoHS=Yes, RoHS Compliant=Yes, Series=RMCF, Size Code=0805, Stock 1=1086026, Supplier 1=Digi-Key, Width=0.049inch
R2 R3: library part CR0805-FX-22R0ELF, "Res Thick Film 0805 22 Ohm 1% 1/8W 100ppm/C Molded SMD SMD Paper Tape on Plastic Reel", Case Code (Imperial)=0805, Case Code (Metric)=2012, Manufacturer=Bourns, Max Operating Temperature=155°C, Max Power Dissipation=125mW, Min Operating Temperature=-55°C, Package Quantity=5000, Resistor Type="Thick Film", Supplier Part Number 1=CR0805-FX-22R0ELFCT-ND, Temperature Coefficient=100ppm/°C, Tolerance=1%, Voltage Rating=150V, Case/Package=0805, Category="Chip SMD Resistors", ComponentLink1Description=https://datasheet.ciiva.com/9121/chpreztr-9121853.pdf?src-supplier=Avnet, ComponentLink1URL=https://datasheet.ciiva.com/9121/chpreztr-9121853.pdf?src-supplier=Avnet, ComponentLink2Description=https://datasheet.ciiva.com/14985/chpreztr-14985915.pdf?src-supplier=Digi-Key, ComponentLink2URL=https://datasheet.ciiva.com/14985/chpreztr-14985915.pdf?src-supplier=Digi-Key, Construction=Rectangular, Contact Plating=Tin, Depth=1.25mm, Features="Moisture Resistant", Height=0.024inch, Length=2mm, Manufacturer Part Number=CR0805-FX-22R0ELF, Military Standard=Not, Mount="Surface Mount", Number of Terminations=2, Packaging="Tape and Reel", Power Rating=125mW, Pricing 1="1=0.10000, 10=0.05000, 100=0.02040, 1000=0.00914, 2500=0.00794 (USD)", Radiation Hardening=No, Resistance=22R, RoHS=Yes, RoHS Compliant=Yes, Series=CR0805, Stock 1=13859, Supplier 1=Digi-Key, Termination=SMD/SMT, Thickness=508um, Width=1.25mm
R5 R6: library part ESR10EZPJ512, "Res Thick Film 0805 5.1K Ohm 5% 2/5W ±200ppm/°C Molded SMD SMD Paper T/R", Case Code (Imperial)=0805, Case Code (Metric)=2012, Manufacturer=Rohm, Max Operating Temperature=155°C, Max Power Dissipation=400mW, Min Operating Temperature=-55°C, Package Quantity=1, Resistance=5.1kR, Resistor Type="Thick Film", Supplier Part Number 1=RHM5.1KKCT-ND, Temperature Coefficient=200ppm/°C, Tolerance=5%, Case/Package=0805, Category="Chip SMD Resistors", ComponentLink1Description=https://datasheet.ciiva.com/2515/esr-2515938.pdf?src-supplier=Digi-Key, ComponentLink1URL=https://datasheet.ciiva.com/2515/esr-2515938.pdf?src-supplier=Digi-Key, ComponentLink2Description=https://datasheet.ciiva.com/2515/esr-2515939.pdf?src-supplier=Digi-Key, ComponentLink2URL=https://datasheet.ciiva.com/2515/esr-2515939.pdf?src-supplier=Digi-Key, ComponentLink3Description=https://datasheet.ciiva.com/2515/esr-2515940.pdf?src-supplier=Digi-Key, ComponentLink3URL=https://datasheet.ciiva.com/2515/esr-2515940.pdf?src-supplier=Digi-Key, Contact Plating=Tin, Features="Automotive AEC-Q200", Height=0.026inch, Length=0.079inch, Manufacturer Part Number=ESR10EZPJ512, Number of Terminations=2, Packaging="Tape and Reel", Pricing 1="1=0.10000, 10=0.09000, 100=0.03450, 1000=0.01518, 2500=0.01311 (USD)", RoHS=Yes, RoHS Compliant=Yes, Series=ESR, Stock 1=4978, Supplier 1=Digi-Key, Width=0.049inch
SW1: "TL3305A Series SPST 12 V 4.5 x 4.5 mm 160 gf Top Actuated SMT Tactile Switch", Manufacturer=E-Switch, Max Operating Temperature=70°C, Min Operating Temperature=-20°C, Operating Force=160gf, Supplier Part Number 1=EG5350CT-ND, Actuator Type=Standard, Category="Tactile Switches", ComponentLink1Description=http://www.farnell.com/datasheets/2554191.pdf?src-supplier=Farnell, ComponentLink1URL=http://www.farnell.com/datasheets/2554191.pdf?src-supplier=Farnell, ComponentLink2Description=http://www.farnell.com/datasheets/2554191.pdf?src-supplier=Newark, ComponentLink2URL=http://www.farnell.com/datasheets/2554191.pdf?src-supplier=Newark, ComponentLink3Description=http://spec_sheets.e-switch.com/specs/P010468.pdf?src-supplier=Digi-Key, ComponentLink3URL=http://spec_sheets.e-switch.com/specs/P010468.pdf?src-supplier=Digi-Key, Illumination Type=Non-Illuminated, Lead Free="Lead Free", Manufacturer Part Number=TL3305AF160QG, Mechanical Life=500000Cycles, Mount="Surface Mount", Packaging="Tape and Reel", Pricing 1="1=0.21000, 10=0.19900, 25=0.18880, 100=0.17170, 250=0.16140, 500=0.14766, 1000=0.12362 (USD)", RoHS=Yes, RoHS Compliant=Yes, Stock 1=28654, Supplier 1=Digi-Key, Switch Function=Off-Mom, Switch Travel=0.2mm, Termination="Gull Wing", Throw Configuration=SPST
U1: "AT90 Series 128 KB Flash 8 kB SRAM 16 MHz 8-Bit Microcontroller - TQFP-64", Case/Package=TQFP, Manufacturer=Microchip, Supplier Part Number 1=556-AT90USB1286-AU, Category=Microcontrollers, ComponentLink1Description=http://www.farnell.com/datasheets/2048476.pdf?src-supplier=Farnell, ComponentLink1URL=http://www.farnell.com/datasheets/2048476.pdf?src-supplier=Farnell, ComponentLink2Description=http://ww1.microchip.com/downloads/en/DeviceDoc/7593S.pdf?src-supplier=Digi-Key, ComponentLink2URL=http://ww1.microchip.com/downloads/en/DeviceDoc/7593S.pdf?src-supplier=Digi-Key, Manufacturer Part Number=AT90USB1286-AU, Pricing 1="1=10.81000, 10=10.81000, 25=9.92000, 50=9.92000, 90=9.72000, 100=9.72000, 1000=9.72000, 10000=9.72000 (USD)", RoHS=Yes, RoHS Compliant=Yes, Stock 1=3, Supplier 1=Mouser
X1: library part 403I35D16M00000, "Crystal 16MHz ±30ppm (Tol) ±50ppm (Stability) 18pF FUND 80Ohm 4-Pin SMD T/R", Case/Package=CSMD, ESR (Equivalent Series Resistance)=80R, Frequency Stability=50ppm, Frequency Tolerance=30ppm, Load Capacitance=18pF, Manufacturer=CTS, Max Operating Temperature=85°C, Min Operating Temperature=-40°C, Package Quantity=3000, Category=Crystals, ComponentLink1Description=https://datasheet.ciiva.com/26909/getdatasheetpartid-501306-26909962.pdf?src-supplier=Verical, ComponentLink1URL=https://datasheet.ciiva.com/26909/getdatasheetpartid-501306-26909962.pdf?src-supplier=Verical, ComponentLink2Description=https://datasheet.ciiva.com/861/008-0288-0-f-861390.pdf?src-supplier=Digi-Key, ComponentLink2URL=https://datasheet.ciiva.com/861/008-0288-0-f-861390.pdf?src-supplier=Digi-Key, ComponentLink3Description=https://datasheet.ciiva.com/29630/008-0288-0-f-29630970.pdf?src-supplier=Digi-Key, ComponentLink3URL=https://datasheet.ciiva.com/29630/008-0288-0-f-29630970.pdf?src-supplier=Digi-Key, ComponentLink4Description=https://datasheet.ciiva.com/29630/008-0288-0-f-29630972.pdf?src-supplier=Digi-Key, ComponentLink4URL=https://datasheet.ciiva.com/29630/008-0288-0-f-29630972.pdf?src-supplier=Digi-Key, ComponentLink5Description=https://datasheet.ciiva.com/29630/008-0288-0-f-29630971.pdf?src-supplier=Digi-Key, ComponentLink5URL=https://datasheet.ciiva.com/29630/008-0288-0-f-29630971.pdf?src-supplier=Digi-Key, ComponentLink6Description=https://datasheet.ciiva.com/29894/008-0288-0-f-29894534.pdf?src-supplier=Avnet, ComponentLink6URL=https://datasheet.ciiva.com/29894/008-0288-0-f-29894534.pdf?src-supplier=Avnet, Contact Plating=Gold, Depth=2.5mm, Frequency=16MHz, Height=0.031inch, Lead Free="Lead Free", Length=3.2mm, Manufacturer Part Number=403I35D16M00000, Mount="Surface Mount", Number of Pins=4, Packaging="Tape and Reel", Pricing 1="1=0.76000, 10=0.66900, 50=0.62540, 100=0.55270, 500=0.52358, 1000=0.43632 (USD)", Radiation Hardening=No, RoHS=Yes, RoHS Compliant=Yes, Series=403, Series Resistance=80R, Stock 1=79, Supplier 1=Digi-Key, Termination=SMD/SMT, Tolerance=30ppm, Width=2.5mm

## Via types
v1: diameter 1.27, hole 0.711, Top Layer to Bottom Layer, 29 vias

## Nets (pads, with @x,y where several pads share a name; then routed paths per layer and width w, separated by ;. In a path a pad name is that pad's centre, name@x,y a point inside that pad or via, vN(x,y) a via of type N, cw(c..) or ccw(c..) an arc to the next point about the centre after c; other vN are vias at no path point)
col0: K1.2 K5.2 K9.2 K13.2 U1.57 | length 104.5
  Top Layer w0.5: K13.2 61.69,29.34 62.4,30.05 62.4,38.293 61.69,39.003 61.69,48.39 62.3,49 62.3,57.343 61.69,57.953 61.69,67.44 62.4,68.15 62.4,76.29 K1.2@61.69,77 ; v1(61.8,80) 64.4,82.6 68.583,82.6 69.783,83.8 74.2,83.8 75.9,85.5 75.9,87.6 80.3,92 96.8,92 v1(96.875,91.925)
  Bottom Layer w0.254: v1(61.8,80) v1@61.871,79.929
  Bottom Layer w0.5: U1.57 94.611,91.725 95.545,91.725 95.597,91.778 96.728,91.778 v1(96.875,91.925)
  Bottom Layer w0.625: K1.2@61.871,77.538 v1@61.871,79.929
col1: K2.2 K6.2 K10.2 K14.2 U1.56 | length 82.1
  Top Layer w0.5: K14.2 80.74,29.34 81.45,30.05 81.45,38.293 80.74,39.003 80.74,48.39 81.35,49 81.35,57.343 80.74,57.953 80.74,67.44 81.45,68.15 81.45,76.29 K2.2@80.74,77 ; K2.2@80.74,77.538 83,79.798 v1(83,86.3)
  Bottom Layer w0.5: v1(83,86.3) 89.2,92.5 U1.56
col2: K3.2 K7.2 K11.2 K15.2 U1.55 | length 80.5
  Top Layer w0.254: K3.2@99.79,77 K3.2
  Top Layer w0.625: K15.2 99.79,29.34 100.5,30.05 100.5,38.293 99.79,39.003 99.79,48.39 100.4,49 100.4,57.343 99.79,57.953 99.79,67.44 100.5,68.15 100.5,76.29 K3.2@99.79,77 ; K3.2@99.79,77.538 102,79.748 102,89.1 100,91.1 v1(99.9,91.1)
  Bottom Layer w0.5: U1.55 94.607,93.279 97.721,93.279 v1(99.9,91.1)
col3: K4.2 K8.2 K12.2 K16.2 U1.54 | length 98.4
  Top Layer w0.254: K12.2@118.84,39.003 K12.2 ; K8.2@118.84,57.953 K8.2
  Top Layer w0.625: v1(92.375,96.25) 92.499,96.25 93.549,97.3 100.4,97.3 118.667,79.033 118.667,77.713 K4.2 ; K16.2 118.84,29.34 119.55,30.05 119.55,38.293 K12.2@118.84,39.003 ; K12.2 118.84,48.39 119.45,49 119.45,57.343 K8.2@118.84,57.953 ; K8.2 118.84,67.44 119.55,68.15 119.55,76.29 K4.2@118.84,77
  Bottom Layer w0.4: v1@92.375,96.042 92.375,94.334 92.609,94.1 U1.54
  Bottom Layer w0.5: v1@92.375,96.042 v1(92.375,96.25)
GND: C1.2 C2.2 C3.1 C4.1 C5.1 C6.1 C7.1 C8.1 C9.1 R4.1 R5.2 R6.2 SW1.3 SW1.4 U1.6 U1.22 U1.53 U1.63 X1.2 | length 63.8
  Top Layer w0.254: v1(89.9,86.7) C3.1@89.9,88.9
  Top Layer w0.5: v1(81.2,90.5) 81.408,90.5 81.641,90.732 C6.1 84.019,90.919 88.731,90.919 89.695,89.955 89.695,89.005 C3.1 ; v1(99.9,93.7) 99.722,93.7 99.222,94.2 92.1,94.2 89.607,96.693 89.607,97.107 92.4,99.9 v1(101.8,99.9)
  Bottom Layer w0.254: X1.2 X1.2@74.1,96.1 ; v1@80.8,90.5 v1(81.2,90.5) ; C4.1@96.8,86.9 C4.1 ; C5.1@96.834,95.329 C5.1 ; R4.1 98.5,99.677 R4.1@98.723,99.9 ; R6.2@125.1,85.8 126.5,87.2 C9.1
  Bottom Layer w0.5: U1.22 80.4,90.1 v1@80.8,90.5 ; U1.6 88.916,85.716 v1(89.9,86.7) ; U1.63 C4.1@96.8,86.9 ; U1.53 94.6,94.914 95.602,94.914 95.912,95.223 96.728,95.223 C5.1@96.834,95.329 ; C5.1 98.204,95.396 v1(99.9,93.7)
  Bottom Layer w0.625: C2.2 C1.2 X1.2@74.1,96.1 ; R4.1@98.723,99.9 v1(101.8,99.9)
NetC1_1: C1.1 U1.24 X1.1 | length 6.8
  Bottom Layer w0.254: C1.1@76,93.7 C1.1
  Bottom Layer w0.5: C1.1@76,93.7 78,91.7 U1.24
  Bottom Layer w0.625: C1.1 X1.1
NetC2_1: C2.1 U1.23 X1.3 | length 19.4
  Bottom Layer w0.254: X1.3@73.7,98.6 X1.3
  Bottom Layer w0.625: X1.3@73.7,98.6 72.8,99.5 72.149,99.5 72,99.351 72,90.3 72.2,90.1 74.654,90.1 76,91.446 76.546,90.9 U1.23
NetC3_2: C3.2 U1.7 | length 4.6
  Top Layer w0.254: C3.2@87.8,88.9 87.8,87.175 88.1,86.875 v1(88.1,86.6)
  Bottom Layer w0.254: v1(88.1,86.6) v1@88.116,86.584
  Bottom Layer w0.5: U1.7 v1@88.116,86.584
NetD1_1: D1.1 K1.1 | length 11.3
  Bottom Layer w0.625: D1.1@67.135,69.655 68.6,71.12 68.6,79.05 68.01,79.64 K1.1
NetD2_1: D2.1 K2.1 | length 11.3
  Bottom Layer w0.625: D2.1 87.5,70.815 87.5,78.901 87.371,79.03 87.371,79.769 K2.1
NetD3_1: D3.1 K3.1 | length 11.2
  Bottom Layer w0.625: D3.1@105.235,69.655 106.6,71.02 106.6,79.15 106.11,79.64 K3.1
NetD4_1: D4.1 K4.1 | length 11.3
  Bottom Layer w0.625: D4.1@124.285,69.655 125.8,71.17 125.8,79 125.16,79.64 K4.1
NetD5_1: D5.1 K5.1 | length 10.9
  Bottom Layer w0.254: D5.1 67.135,50.605 68.01,51.48 K5.1
NetD6_1: D6.1 K6.1 | length 10.9
  Bottom Layer w0.254: D6.1 86.185,50.605 87.06,51.48 K6.1
NetD7_1: D7.1 K7.1 | length 10.9
  Bottom Layer w0.254: D7.1 105.235,50.605 106.11,51.48 K7.1
NetD8_1: D8.1 K8.1 | length 10.9
  Bottom Layer w0.254: D8.1 124.285,50.605 125.16,51.48 K8.1
NetD9_1: D9.1 K9.1 | length 10.9
  Bottom Layer w0.254: D9.1 67.135,31.555 68.01,32.43 K9.1
NetD10_1: D10.1 K10.1 | length 10.9
  Bottom Layer w0.254: D10.1 86.185,31.555 87.06,32.43 K10.1
NetD11_1: D11.1 K11.1 | length 10.9
  Bottom Layer w0.254: D11.1 105.235,31.555 106.11,32.43 K11.1
NetD12_1: D12.1 K12.1 | length 10.9
  Bottom Layer w0.254: D12.1 124.285,31.555 125.16,32.43 K12.1
NetD13_1: D13.1 K13.1 | length 10.9
  Bottom Layer w0.254: D13.1 67.135,12.505 68.01,13.38 K13.1
NetD14_1: D14.1 K14.1 | length 10.9
  Bottom Layer w0.254: D14.1 86.185,12.505 87.06,13.38 K14.1
NetD15_1: D15.1 K15.1 | length 10.9
  Bottom Layer w0.254: D15.1 105.235,12.505 106.11,13.38 K15.1
NetD16_1: D16.1 K16.1 | length 10.9
  Bottom Layer w0.254: D16.1 124.285,12.505 125.16,13.38 K16.1
NetD17_1: D17.1 SW1.2 | length 19.7
  Bottom Layer w0.254: SW1.2@68.4,85.7 SW1.2
  Bottom Layer w0.625: D17.1 60.463,96.603 60.463,88.637 61,88.1 66,88.1 SW1.2@68.4,85.7
NetD17_2: D17.2 R7.1 | length 4
  Bottom Layer w0.254: R7.1 R7.1@62.8,92.334
  Bottom Layer w0.625: D17.2 62.2,92.934 R7.1@62.8,92.334
NetF1_1: F1.1 J1.A4/B9 | length 4
  Bottom Layer w0.5: F1.1 116.075,93.3 116.173,93.398 116.173,93.773 117.062,94.662 117.062,95.564 J1.A4/B9@117.093,95.595
NetF2_1: F2.1 J1.B4/A9 | length 2.7
  Bottom Layer w0.254: J1.B4/A9@121.893,95.934 121.893,94.805 122.3,94.398 F2.1
NetJ1_A5: J1.A5 R5.1 | length 9.9
  Top Layer w0.254: v1(117.5,93.3) 117.629,93.429 119.071,93.429 119.8,92.7 v1@119.8,89.8
  Bottom Layer w0.254: v1(117.5,93.3) 117.694,93.494 117.694,94.287 118.235,94.828 J1.A5@118.235,95.595 ; R5.1 v1(119.8,89.3)
NetJ1_A6: J1.A6 J1.B6 R2.1 | length 12.5
  Bottom Layer w0.2: J1.A6@119.243,95.934 119.243,96.982 119.361,97.1 120.215,97.1
  Bottom Layer w0.254: 120.215,97.1 120.215,91.167 122.346,89.036 R2.1
NetJ1_A7: J1.A7 J1.B7 R3.1 | length 10.8
  Bottom Layer w0.254: R3.1@116.95,87.85 118.715,89.615 J1.B7 ; 118.743,94.225 119.589,94.225 119.738,94.374 119.738,95.027 119.738,95.572 J1.A7
NetJ1_B5: J1.B5 R6.1 | length 9.9
  Bottom Layer w0.254: J1.B5 121.215,94.354 120.9,94.039 120.9,91.2 124.177,87.923 124.577,87.923 R6.1
NetR1_2: R1.2 SW1.1 U1.20 | length 9.8
  Top Layer w0.254: R1.2 R1.2@72.2,86.6
  Top Layer w0.625: R1.2@72.2,86.6 72.6,86.2 v1(73.8,86.2)
  Bottom Layer w0.254: SW1.1@75.2,86.2 75.384,86.016 SW1.1 SW1.1@75.887,85.887
  Bottom Layer w0.5: SW1.1@75.887,85.887 76.732,85.887 77.3,86.455 77.3,87.6 78.2,88.5 U1.20
  Bottom Layer w0.625: v1(73.8,86.2) 73.975,86.2 74.159,86.016 SW1.1@75.384,86.016
NetR2_2: R2.2 U1.5 | length 36.1
  Bottom Layer w0.5: U1.5 89.737,84.409 89.737,83.26 91.097,81.9 98.8,81.9 100.7,83.8 120.446,83.8 121.946,85.3 121.946,85.6 122.046,85.7 R2.2
NetR3_2: R3.2 U1.4 | length 28.8
  Bottom Layer w0.254: 116.7,85.2 R3.2
  Bottom Layer w0.5: U1.4 90.537,84.409 90.537,83.527 90.872,83.191 97.534,83.191 99.543,85.2 116.7,85.2
NetR4_2: R4.2 U1.43 | length 9.4
  Bottom Layer w0.312: 88.937,98.763 89.4,98.3 93.1,98.3 94.3,99.5 R4.2
  Bottom Layer w0.5: U1.43 88.937,99.749 88.937,98.763
row0: D1.2 D2.2 D3.2 D4.2 U1.61 | length 84.3
  Top Layer w0.625: v1(90.8,72.9) 90.8,73.075 91.1,73.375 91.1,74.547 91.3,74.747 91.3,86.944 91.377,87.021 91.377,87.477 v1(91.5,87.6)
  Bottom Layer w0.5: v1(91.5,87.6) 92.4,88.5 U1.61
  Bottom Layer w0.625: D1.2@63.865,69.345 65.51,67.7 72.417,67.7 74.217,69.5 D2.2 ; D2.2@82.915,69.345 84.46,67.8 90.591,67.8 91.3,68.509 ; v1(90.8,72.9) 90.8,70.667 91.3,70.167 91.3,68.509 ; D3.2@101.965,69.345 103.51,67.8 110.617,67.8 112.317,69.5 D4.2 ; D3.2 94.1,69.5 93.109,68.509 91.3,68.509
row1: D5.2 D6.2 D7.2 D8.2 U1.60 | length 105.4
  Top Layer w0.5: v1(92.025,90.15) 92.025,89.942 92.9,89.067 92.9,53.578 92.4,53.078 v1(92.4,52.9)
  Bottom Layer w0.254: 92.4,49.459 v1(92.4,52.9)
  Bottom Layer w0.5: v1(92.025,90.15) 92.233,90.15 93.083,89.3 U1.60
  Bottom Layer w0.625: D5.2@63.865,50.295 65.51,48.65 72.417,48.65 74.217,50.45 D6.2 ; D6.2@82.915,50.295 84.46,48.75 90.591,48.75 91.3,49.459 93.109,49.459 94.1,50.45 D7.2 ; D7.2@101.965,50.295 103.51,48.75 110.617,48.75 112.317,50.45 D8.2
row2: D9.2 D10.2 D11.2 D12.2 U1.59 | length 125
  Top Layer w0.625: v1(93.605,34.495) 93.605,34.589 94.2,35.184 94.2,87.8 95.1,88.7 95.618,88.7 95.694,88.623 97.002,88.623 v1(97.125,88.5)
  Bottom Layer w0.254: v1@93.6,34.5 v1(93.605,34.495) 93.605,30.905
  Bottom Layer w0.5: U1.59 94.611,90.075 95.55,90.075 v1(97.125,88.5)
  Bottom Layer w0.625: D9.2@63.865,31.245 65.51,29.6 72.417,29.6 74.217,31.4 D10.2 ; D10.2@82.915,31.245 84.46,29.7 90.591,29.7 91.3,30.409 93.109,30.409 94.1,31.4 D11.2 ; D11.2@101.965,31.245 103.51,29.7 110.617,29.7 112.317,31.4 D12.2
row3: D13.2 D14.2 D15.2 D16.2 U1.58 | length 145.7
  Top Layer w0.625: v1(95.9,15.7) 95.9,84.4 v1(100.1,88.6)
  Bottom Layer w0.254: 95.9,12.35 v1(95.9,15.7)
  Bottom Layer w0.5: U1.58 95.889,90.9 97.039,89.75 98.95,89.75 v1(100.1,88.6)
  Bottom Layer w0.625: D13.2@63.865,12.195 65.51,10.55 72.417,10.55 74.217,12.35 D14.2 ; D14.2@82.915,12.195 84.46,10.65 90.591,10.65 91.3,11.359 93.109,11.359 94.1,12.35 D15.2 ; D15.2@101.965,12.195 103.51,10.65 110.617,10.65 112.317,12.35 D16.2
VCC: C4.2 C5.2 C6.2 C7.2 C8.2 C9.2 F1.2 F2.2 R1.1 R7.2 U1.3 U1.8 U1.21 U1.52 U1.64 | length 118.8
  Top Layer w0.254: 66.6,88.5 R1.1 ; v1(114.7,88.1) 122.3,88.1 v1(124.3,90.1)
  Top Layer w0.5: v1(81.4,88.6) 81.608,88.6 81.841,88.832 C6.2
  Top Layer w0.625: v1(60.375,82.275) 66.6,88.5 ; v1(74.275,82.1) 80.652,88.477 81.277,88.477 v1(81.4,88.6)
  Bottom Layer w0.254: C7.2@69.1,93.4 C7.2 C7.2@69.2,93.3 ; v1@81.184,88.6 v1(81.4,88.6) ; U1.52 U1.52@94.73,95.844 ; C4.2@96.377,85.223 96.7,84.9 C4.2 C4.2@97.082,85.082 ; C5.2@96.7,97.296 C5.2 ; F1.2@114.7,91.65 F1.2 ; v1@124.2,90.2 v1(124.3,90.1) ; C9.2@126.446,91.4 C9.2
  Bottom Layer w0.3: U1.52@94.73,95.844 95.544,95.844 95.908,96.208 95.908,96.503 C5.2@96.7,97.296
  Bottom Layer w0.5: U1.21 80.484,89.3 v1@81.184,88.6 ; U1.3@91.337,84.451 91.337,85.333 92.103,86.1 U1.64 95.7,86.1 96.377,85.423 C4.2@96.377,85.223
  Bottom Layer w0.625: v1(60.375,82.275) 73.925,82.275 74.1,82.1 v1(74.275,82.1) ; R7.2 67.734,92.034 C7.2@69.1,93.4 ; v1(69.2,91.5) C7.2@69.2,93.3 ; U1.8@87.316,84.007 87.316,83.459 87.646,83.129 87.909,83.129 90.612,80.425 v1(98.075,80.425) ; C5.2 100.604,97.296 103.96,93.94 v1(103.96,86.9) 99.7,86.9 97.882,85.082 97.604,85.082 97.559,85.038 C4.2@97.082,85.038 ; C8.2@112.75,91.75 F1.2 ; v1(114.7,88.1) F1.2@114.7,91.65 ; F2.2 124.2,91.85 ; v1@124.2,90.2 124.2,91.85 ; C9.2@126.446,91.4 125.2,91.4 124.75,91.85 124.2,91.85
pads on no net: J1. J1.A1/B12 J1.A8 J1.B1/A12 J1.B8 J1.S1 J1.S2 J1.S3 J1.S4 K1. K2. K3. K4. K5. K6. K7. K8. K9. K10. K11. K12. K13. K14. K15. K16. U1.1 U1.2 U1.9 U1.10 U1.11 U1.12 U1.13 U1.14 U1.15 U1.16 U1.17 U1.18 U1.19 U1.25 U1.26 U1.27 U1.28 U1.29 U1.30 U1.31 U1.32 U1.33 U1.34 U1.35 U1.36 U1.37 U1.38 U1.39 U1.40 U1.41 U1.42 U1.44 U1.45 U1.46 U1.47 U1.48 U1.49 U1.50 U1.51 U1.62 X1.4

## Polygon pours and split planes (outlines as drawn)
VCC on Top Layer "VCC" (solid, pour order 3): 96.478,83.2 96.55,83.128 96.55,78.472 99.525,78.5 99.525,78.875 99.625,83.425
VCC on Top Layer "VCC" (solid, pour order 1): 58.6,98.611 58.6,84 58.6,83.625 58.6,83.2 129.6,83.2 129.6,91.5 123.6,98.611
GND on Bottom Layer "GND" (solid, pour order 2): 57.719,101.206 57.719,100.587 57.719,83.087 130.019,83.087 130.119,83.187 129.719,83.587 129.719,100.994

## Keep-outs
Keep-Out Layer:
  the board outline again, w0.4